# Altium PCB BeagleBone_Black_RevB4_V2.PcbDoc (part 1 of 3)
Units mm, origin at the board's own origin, x right, y up, seen from the top; angles counter-clockwise.
Board outline 100 x 100 mm, 2 copper layers (Top Layer, Bottom Layer); 274 components, 245 nets, 1313 pads, 251 vias.
Unrouted connection lines stored in the file: 891.
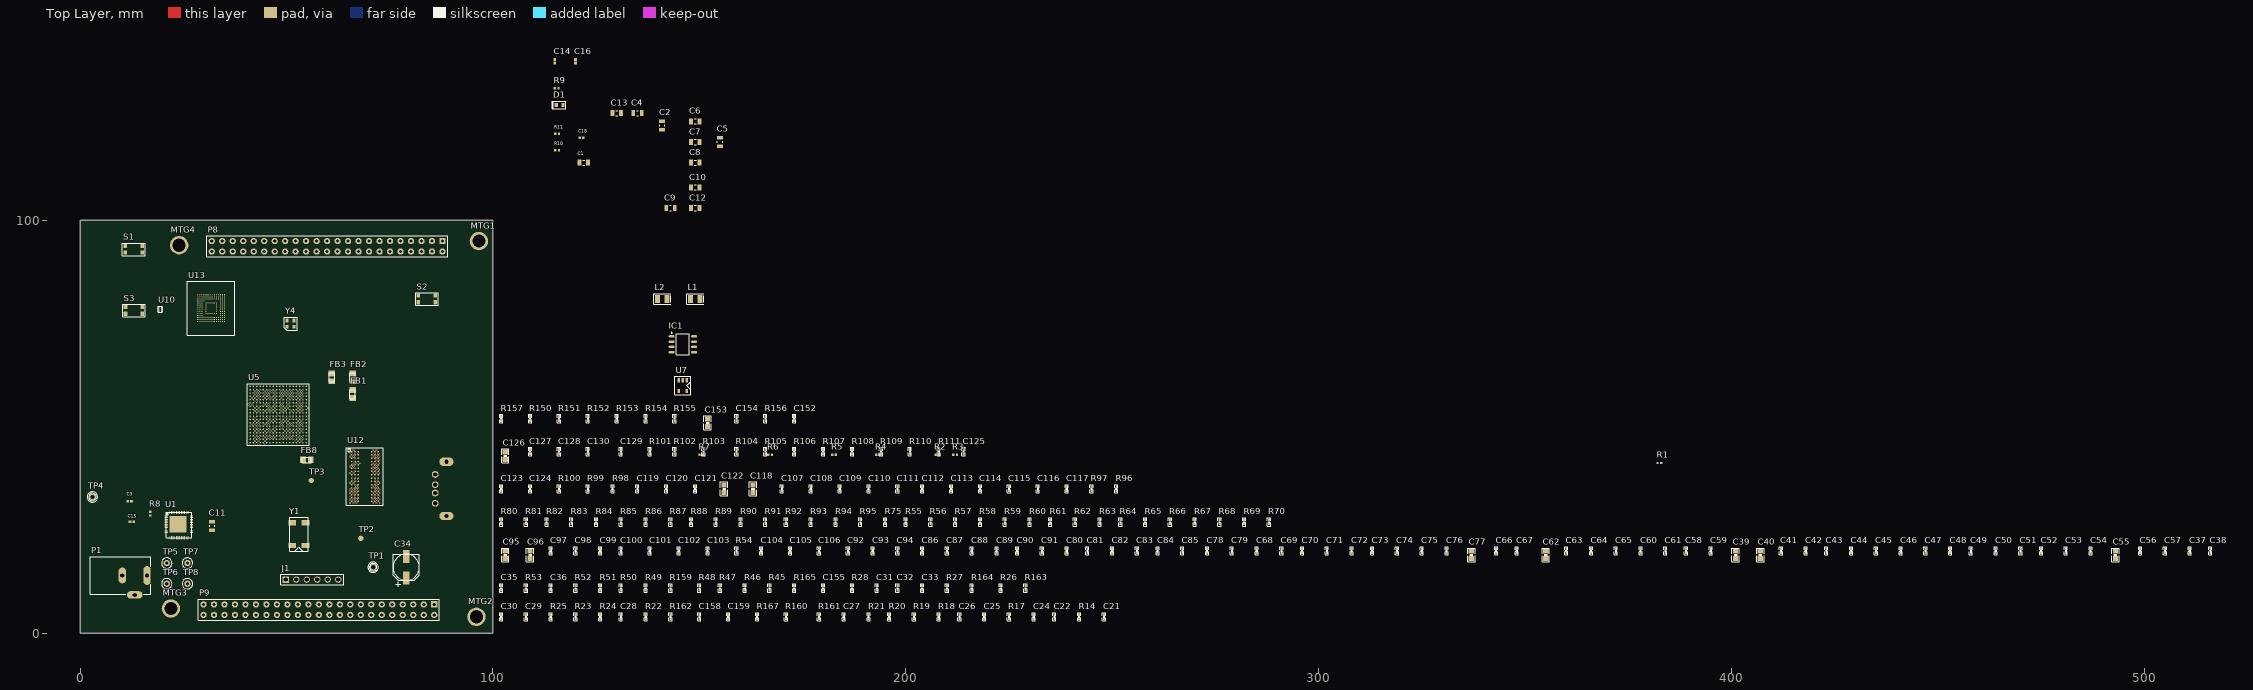
[diagram p0: Top Layer view]
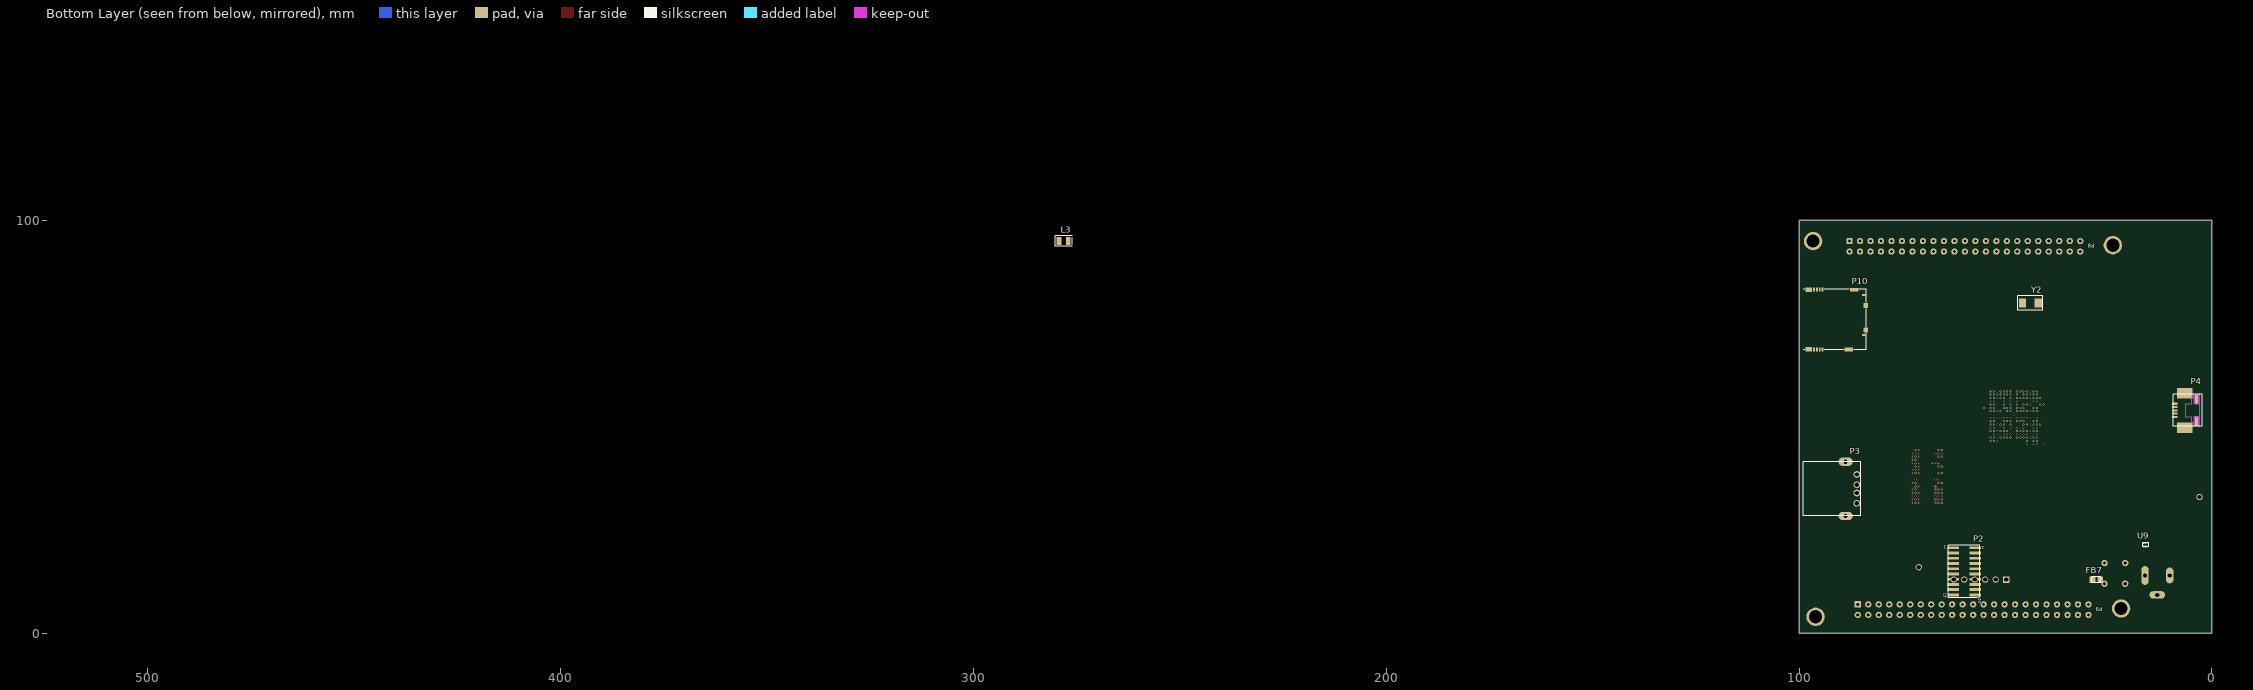
[diagram p1: Bottom Layer view, seen from below]

## Layer stack, top to bottom
Top Solder: solder mask 0.0102, Solder Resist, Dk 3.5
Top Layer: signal copper 0.0356
Dielectric 1: dielectric 0.32, FR-4, Dk 4.8
Bottom Layer: signal copper 0.0356
Bottom Solder: solder mask 0.0102, Solder Resist, Dk 3.5

## Board outline
0,0 100,0 100,100 0,100

## Design rules (kind name [scope] priority, off if disabled: settings)
Clearance Clearance_BGA_Fanout [WithinRoom('BGA_Fanout')] p1: gap=0.1 ignorepadtopadclearanceinfootprint=FALSE
Clearance [All] p2: gap=0.254 ignorepadtopadclearanceinfootprint=FALSE except(0: Arc-Hole Track-Hole SMDPad-Hole THPad-Hole Via-Hole Fill-Hole Poly-Hole Region-Hole Text-Hole)
FanoutControl Fanout_BGA [IsBGA] p1: bgadir=Out bgaviamode=Centered fanoutstyle=BGA fanoutdirection=Alternating viagrid=0.025 // Fanout_BGA (Default Rule)
PolygonConnect [All] p1: connectstyle=Relief reliefconductorwidth=0.254 reliefentries=4 polygonreliefangle="90 Angle" airgapwidth=0.254
RoutingVias RoutingVias_BGA_Fanout [WithinRoom('BGA_Fanout')] p1: holewidth=0.2 width=0.4 viastyle="Through Hole" minholewidth=0.2 minwidth=0.4 maxholewidth=0.2 maxwidth=0.4
RoutingVias [All] p2: holewidth=0.711 width=1.27 viastyle="Through Hole" minholewidth=0.711 minwidth=1.27 maxholewidth=0.711 maxwidth=1.27
SolderMaskExpansion [All] p1: expansion=0.102
Width Width_BGA_Fanout [WithinRoom('BGA_Fanout')] p1: maxlimit=0.1 minlimit=0.1 preferedwidth=0.1 minimp=50.000000 maximp=50.000000 favimp=50.000000
Width [All] p2: maxlimit=0.254 minlimit=0.254 preferedwidth=0.254
29 further rules are at their usual default settings.

## Classes and differential pairs
net class DDR_D[15..0]: DDR_D0 DDR_D1 DDR_D2 DDR_D3 DDR_D4 DDR_D5 DDR_D6 DDR_D7 DDR_D8 DDR_D9 DDR_D10 DDR_D11 DDR_D12 DDR_D13 DDR_D14 DDR_D15
net class DDR_BA[2..0]: DDR_BA0 DDR_BA1 DDR_BA2
net class DDR_A[15..0]: DDR_A0 DDR_A1 DDR_A2 DDR_A3 DDR_A4 DDR_A5 DDR_A6 DDR_A7 DDR_A8 DDR_A9 DDR_A10 DDR_A11 DDR_A12 DDR_A13 DDR_A14 DDR_A15
component class "P11_Exp Conn, uSD, and ": C152 C153 C154 P8 P9 P10 R150 R151 R152 R153 R154 R155 R156 R157 TP4 U7
component class P08_eMMC: C125 C126 C127 C128 C129 C130 R101 R102 R103 R104 R105 R106 R107 R108 R109 R110 R111 U13
component class "P07_DDR3 Memory": C107 C108 C109 C110 C111 C112 C113 C114 C115 C116 C117 C118 C119 C120 C121 C122 C123 C124 R96 R97 R98 R99 R100 U12
component class "P06_LED, Config, & Button": R55 R56 R57 R58 R59 R60 R61 R62 R63 R64 R65 R66 R67 R68 R69 R70 R75 R80 R81 R82 R83 R84 R85 R86 R87 R88 R89 R90 R91 R92 R93 R94 R95 S2
component class "P05_Processor Page 3 of 3": C37 C38 C39 C40 C41 C42 C43 C44 C45 C46 C47 C48 C49 C50 C51 C52 C53 C54 C55 C56 C57 C58 C59 C60 C61 C62 C63 C64 C65 C66 C67 C68 C69 C70 C71 C72 C73 C74 C75 C76 C77 C78 C79 C80 C81 C82 C83 C84 C85 C86 C87 C88 C89 C90 C91 C92 C93 C94 C95 C96 C97 C98 C99 C100 C101 C102 C103 C104 C105 C106 FB1 FB2 FB3 R54 TP2 TP3
component class "P04_Processor 2 or 3, USB and Serial": C31 C32 C33 C34 C35 C36 C155 FB7 FB8 J1 P3 P4 R26 R27 R28 R45 R46 R47 R48 R49 R50 R51 R52 R53 R159 R163 R164 R165 U8 U9 U10 U15
component class "P03_Processor 1 of 3, JTAG Header": C21 C22 C24 C25 C26 C27 C28 C29 C30 C158 C159 P2 "P02_Power Management" R14 R17 R18 R19 R20 R21 R22 R23 R24 R25 R160 R161 R162 R167 S1 U3 U5 Y1 Y2 Y4
component class "P02_Power Management": C1 C2 C3 C4 C5 C6 C7 C8 C9 C10 C11 C12 C13 C14 C15 C16 C18 D1 IC1 L1 L2 L3 MTG1 MTG2 MTG3 MTG4 P1 R1 R2 R3 R4 R5 R6 R7 R8 R9 R10 R11 S3 TP1 TP5 TP6 TP7 TP8 U1

## Components (designator, comment, footprint, x,y, rotation, side; value= is the part's Value field where it differs from the comment)
C1 "C2012X6S1A106K085AC" CAP0805 122,114 r0 top
C2 "C2012X6S1A106K085AC" CAP0805 141,123 r90 top
C3 "C0402C104K4RACTU" CAP0402 12,32 r0 top
C4 "C2012X6S1A106K085AC" CAP0805 135.025,126 r0 top
C5 "C2012X6S1A106K085AC" CAP0805 155,119 r90 top
C6 "C2012X6S1A106K085AC" CAP0805 149,124 r180 top
C7 "C2012X6S1A106K085AC" CAP0805 149,119 r0 top
C8 "C2012X6S1A106K085AC" CAP0805 149.025,114 r0 top
C9 "C2012X6S1A106K085AC" CAP0805 143,103 r0 top
C10 "C2012X6S1A106K085AC" CAP0805 149.025,108 r0 top
C11 "C2012X6S1A106K085AC" CAP0805 32,26 r90 top
C12 "C2012X6S1A106K085AC" CAP0805 149,103 r0 top
C13 "C2012X6S1A106K085AC" CAP0805 130,126 r0 top
C14 "C1005X5R0J225K050BC" CAP0402 115,138.56 r90 top
C15 "C1005X5R0J225K050BC" CAP0402 12.56,27 r180 top
C16 "C1005X5R0J225K050BC" CAP0402 120,138.56 r90 top
C18 "C0402C104K4RACTU" CAP0402 121.44,120 r180 top
C21 "18pF, 50V" 402 248,4 r90 top
C22 "18pF, 50V" 402 236,4 r90 top
C24 "1uF, 10V" 402 231,4 r90 top
C25 "18pF, 50V" 402 219,4 r90 top
C26 "18pF, 50V" 402 213,4 r90 top
C27 "0.1uf, 6V3" 402 185,4 r90 top
C28 "0.1uf, 6V3" 402 131,4 r90 top
C29 "0.1uf, 6V3" 402 108,4 r90 top
C30 "0.1uf, 6V3" 402 102,4 r90 top
C31 "0.1uf, 6V3" 402 193,11 r90 top
C32 "1nF, 50V" 402 198,11 r90 top
C33 "0.1uf, 6V3" 402 204,11 r90 top
C34 "100uF, 6V3" RD205SMD_250D 79,16 r90 top
C35 "0.1uf, 6V3" 402 102,11 r90 top
C36 "0.1uf, 6V3" 402 114,11 r90 top
C37 "0.1uf, 6V3" 402 511,20 r90 top
C38 "0.1uf, 6V3" 402 516,20 r90 top
C39 "10uF, 10V" 805 401,19 r90 top
C40 "10uF, 10V" 805 407,19 r90 top
C41 "0.1uf, 6V3" 402 412,20 r90 top
C42 "0.1uf, 6V3" 402 418,20 r90 top
C43 "0.1uf, 6V3" 402 423,20 r90 top
C44 "0.1uf, 6V3" 402 429,20 r90 top
C45 "0.1uf, 6V3" 402 435,20 r90 top
C46 "0.1uf, 6V3" 402 441,20 r90 top
C47 "0.1uf, 6V3" 402 447,20 r90 top
C48 "0.1uf, 6V3" 402 453,20 r90 top
C49 "0.1uf, 6V3" 402 458,20 r90 top
C50 "0.1uf, 6V3" 402 464,20 r90 top
C51 "0.1uf, 6V3" 402 470,20 r90 top
C52 "0.1uf, 6V3" 402 475,20 r90 top
C53 "0.1uf, 6V3" 402 481,20 r90 top
C54 "0.1uf, 6V3" 402 487,20 r90 top
C55 "10uF, 10V" 805 493,19 r90 top
C56 "0.1uf, 6V3" 402 499,20 r90 top
C57 "0.1uf, 6V3" 402 505,20 r90 top
C58 "0.1uf, 6V3" 402 389,20 r90 top
C59 "0.1uf, 6V3" 402 395,20 r90 top
C60 "0.1uf, 6V3" 402 378,20 r90 top
C61 "0.1uf, 6V3" 402 384,20 r90 top
C62 "10uF, 10V" 805 355,19 r90 top
C63 "0.1uf, 6V3" 402 360,20 r90 top
C64 "0.1uf, 6V3" 402 366,20 r90 top
C65 "0.1uf, 6V3" 402 372,20 r90 top
C66 "0.1uf, 6V3" 402 343,20 r90 top
C67 "0.1uf, 6V3" 402 348,20 r90 top
C68 "0.1uf, 6V3" 402 285,20 r90 top
C69 "0.1uf, 6V3" 402 291,20 r90 top
C70 "0.1uf, 6V3" 402 296,20 r90 top
C71 "0.1uf, 6V3" 402 302,20 r90 top
C72 "0.1uf, 6V3" 402 308,20 r90 top
C73 "0.1uf, 6V3" 402 313,20 r90 top
C74 "0.1uf, 6V3" 402 319,20 r90 top
C75 "0.1uf, 6V3" 402 325,20 r90 top
C76 "0.1uf, 6V3" 402 331,20 r90 top
C77 "10uF, 10V" 805 337,19 r90 top
C78 "0.1uf, 6V3" 402 273,20 r90 top
C79 "0.1uf, 6V3" 402 279,20 r90 top
C80 "0.1uf, 6V3" 402 239,20 r90 top
C81 "0.1uf, 6V3" 402 244,20 r90 top
C82 "0.1uf, 6V3" 402 250,20 r90 top
C83 "0.1uf, 6V3" 402 256,20 r90 top
C84 "0.1uf, 6V3" 402 261,20 r90 top
C85 "0.1uf, 6V3" 402 267,20 r90 top
C86 "0.1uf, 6V3" 402 204,20 r90 top
C87 "0.1uf, 6V3" 402 210,20 r90 top
C88 "0.1uf, 6V3" 402 216,20 r90 top
C89 "1uF, 10V" 402 222,20 r90 top
C90 "1uF, 10V" 402 227,20 r90 top
C91 "1uF, 10V" 402 233,20 r90 top
C92 "0.1uf, 6V3" 402 186,20 r90 top
C93 "0.1uf, 6V3" 402 192,20 r90 top
C94 "0.1uf, 6V3" 402 198,20 r90 top
C95 "10uF, 10V" 805 103,19 r90 top
C96 "10uF, 10V" 805 109,19 r90 top
C97 "0.1uf, 6V3" 402 114,20 r90 top
C98 "0.1uf, 6V3" 402 120,20 r90 top
C99 "0.1uf, 6V3" 402 126,20 r90 top
C100 "0.1uf, 6V3" 402 131,20 r90 top
C101 "0.1uf, 6V3" 402 138,20 r90 top
C102 "0.1uf, 6V3" 402 145,20 r90 top
C103 "0.1uf, 6V3" 402 152,20 r90 top
C104 "1uF, 10V" 402 165,20 r90 top
C105 "0.1uf, 6V3" 402 172,20 r90 top
C106 "0.1uf, 6V3" 402 179,20 r90 top
C107 "0.1uf, 6V3" 402 170,35 r90 top
C108 "0.1uf, 6V3" 402 177,35 r90 top
C109 "0.1uf, 6V3" 402 184,35 r90 top
C110 "0.1uf, 6V3" 402 191,35 r90 top
C111 "0.1uf, 6V3" 402 198,35 r90 top
C112 "0.1uf, 6V3" 402 204,35 r90 top
C113 "0.1uf, 6V3" 402 211,35 r90 top
C114 "0.1uf, 6V3" 402 218,35 r90 top
C115 "0.1uf, 6V3" 402 225,35 r90 top
C116 "0.1uf, 6V3" 402 232,35 r90 top
C117 "0.1uf, 6V3" 402 239,35 r90 top
C118 "10uF, 10V" 805 163,35 r90 top
C119 "0.1uf, 6V3" 402 135,35 r90 top
C120 "0.1uf, 6V3" 402 142,35 r90 top
C121 "0.1uf, 6V3" 402 149,35 r90 top
C122 "10uF, 10V" 805 156,35 r90 top
C123 "1nF, 50V" 402 102,35 r90 top
C124 "0.1uf, 6V3" 402 109,35 r90 top
C125 "2.2uF, 6V3" 402 214,44 r90 top
C126 "10uF, 10V" 805 103,43 r90 top
C127 "0.1uf, 6V3" 402 109,44 r90 top
C128 "0.1uf, 6V3" 402 116,44 r90 top
C129 "0.1uf, 6V3" 402 131,44 r90 top
C130 "0.1uf, 6V3" 402 123,44 r90 top
C152 "0.1uf, 6V3" 402 173,52 r90 top
C153 "10uF, 10V" 805 152,51 r90 top
C154 "0.1uf, 6V3" 402 159,52 r90 top
C155 "0.1uf, 6V3" 402 180,11 r90 top
C158 "0.1uf, 6V3" 402 150,4 r90 top
C159 "0.1uf, 6V3" 402 157,4 r90 top
D1 "598-8170-107F" LED_0603 116.174,128 r0 top
FB1 "150OHM800mA" SM-7351-IND-0805 66,57.95 r90 top
FB2 "150OHM800mA" SM-7351-IND-0805 66,62 r90 top
FB3 "150OHM800mA" SM-7351-IND-0805 61,62 r90 top
FB7 "150OHM800mA" SM-7351-IND-0805 28,13 r180 bottom
FB8 "0.1 Ohm, 0805" SM-7351-IND-0805 54.95,42 r180 top
IC1 "TL5209" SOIC-8 146,70 r0 top
J1 "HEADER 6" SIP6 56.19,13 r90 top
L1 "2.2uH, 2.6A" 2520 149,81 r0 top
L2 "2.2uH, 2.6A" 2520 141,81 r0 top
L3 "2.2uH, 2.6A" 2520 278.143,95 r180 bottom
MTG1 "MHOLE" MTGH200C125D_PL 97,95 r0 top
MTG2 "MHOLE" MTGH200C125D_PL 96.394,4 r0 top
MTG3 "MHOLE" MTGH200C125D_PL 22.394,6 r0 top
MTG4 "MHOLE" MTGH200C125D_PL 24.394,94 r0 top
P1 "PJ-200A" CONN3-PWR-PJ102A 10,14 r180 top
P2 "CTI JTAG,DNI" HEADER10X2_SMD 60,15 r90 bottom
P3 "USB-A Conn. - 87520-xx1xx" usb_a_sh 92,35 r270 bottom
P4 "mini USB-B" USB5MINI_4SHIELDED_SMD-5 6,54 r180 bottom
P8 "FEMALE HEADER 2x23" HEADER23X2 59.84,93.73 r180 top
P9 "FEMALE HEADER 2x23" HEADER23X2 57.84,5.73 r180 top
P10 "MOLEX 502570-001" SD-MICRO-SCHA5B0300 91,76 r90 bottom
R1 "RC0402FR-07100KL" RES0402 382.524,41.275 r0 top
R2 "RC0402FR-071K5L" RES0402 207.631,43.275 r0 top
R3 "RC0402FR-071K5L" RES0402 211.949,43.275 r0 top
R4 "RC0402JR-070RL" RES0402 193.28,43.275 r0 top
R5 "RC0402JR-070RL" RES0402 182.62,43.275 r0 top
R6 "RC0402JR-070RL" RES0402 167.126,43.275 r0 top
R7 "RC0402JR-070RL" RES0402 150.489,43.275 r0 top
R8 "RC0402JR-070RL" RES0402 17,29 r90 top
R9 "RC0402FR-07820RL" RES0402 115.45,132 r0 top
R10 "RC0402FR-07470KL" RES0402 115.55,117 r180 top
R11 "RC0402FR-07280KL" RES0402 115.55,121 r0 top
R14 "10K, 1%" 402 242,4 r90 top
R17 "1M, 1%" 402 225,4 r90 top
R18 "33, 0402" 402 208,4 r90 top
R19 "0R, 1%" 402 202,4 r90 top
R20 "0R, 1%" 402 196,4 r90 top
R21 "33, 0402" 402 191,4 r90 top
R22 "49.9, 1%" 402 137,4 r90 top
R23 "4.75K, 1%" 402 120,4 r90 top
R24 "4.75K, 1%" 402 126,4 r90 top
R25 "4.75K, 1%" 402 114,4 r90 top
R26 "4.75K, 1%" 402 223,11 r90 top
R27 "0R, 1%" 402 210,11 r90 top
R28 "33, 0402" 402 187,11 r90 top
R45 "33, 0402" 402 167,11 r90 top
R46 "33, 0402" 402 161,11 r90 top
R47 "33, 0402" 402 155,11 r90 top
R48 "33, 0402" 402 150,11 r90 top
R49 "0R, 1%" 402 137,11 r90 top
R50 "0R, 1%" 402 131,11 r90 top
R51 "0R, 1%" 402 126,11 r90 top
R52 "10k, 1%" 402 120,11 r90 top
R53 "10k, 1%" 402 108,11 r90 top
R54 "10k, 1%" 402 159,20 r90 top
R55 "100K, 1%, DNI" 402 200,27 r90 top
R56 "100K, 1%" 402 206,27 r90 top
R57 "100K, 1%, DNI" 402 212,27 r90 top
R58 "100K, 1%,DNI" 402 218,27 r90 top
R59 "100K, 1%, DNI" 402 224,27 r90 top
R60 "100K, 1%,DNI" 402 230,27 r90 top
R61 "100K, 1%,DNI" 402 235,27 r90 top
R62 "100K, 1%,DNI" 402 241,27 r90 top
R63 "100K, 1%,DNI" 402 247,27 r90 top
R64 "100K, 1%,DNI" 402 252,27 r90 top
R65 "100K, 1%" 402 258,27 r90 top
R66 "100K, 1%" 402 264,27 r90 top
R67 "100K, 1%" 402 270,27 r90 top
R68 "100K, 1%" 402 276,27 r90 top
R69 "100K, 1%, DNI" 402 282,27 r90 top
R70 "100K, 1%,DNI" 402 288,27 r90 top
R75 "100" 402 195,27 r90 top
R80 "100K, 1%" 402 102,27 r90 top
R81 "100K, 1%, DNI" 402 108,27 r90 top
R82 "100K, 1%" 402 113,27 r90 top
R83 "100K, 1%" 402 119,27 r90 top
R84 "100K, 1%" 402 125,27 r90 top
R85 "100K, 1%" 402 131,27 r90 top
R86 "100K, 1%" 402 137,27 r90 top
R87 "100K, 1%" 402 143,27 r90 top
R88 "100K, 1%" 402 148,27 r90 top
R89 "100K, 1%" 402 154,27 r90 top
R90 "100K, 1%, DNI" 402 160,27 r90 top
R91 "100K, 1%, DNI" 402 166,27 r90 top
R92 "100K, 1%, DNI" 402 171,27 r90 top
R93 "100K, 1%, DNI" 402 177,27 r90 top
R94 "100K, 1%" 402 183,27 r90 top
R95 "100K, 1%" 402 189,27 r90 top
R96 "10k, 1%" 402 251,35 r90 top
R97 "1.5K, 1%" 402 245,35 r90 top
R98 "10k, 1%" 402 129,35 r90 top
R99 "240, 1%" 402 123,35 r90 top
R100 "10k, 1%" 402 116,35 r90 top
R101 "10k, 1%" 402 138,44 r90 top
R102 "10k, 1%" 402 144,44 r90 top
R103 "10k, 1%" 402 151,44 r90 top
R104 "10k, 1%" 402 159,44 r90 top
R105 "10k, 1%" 402 166,44 r90 top
R106 "10k, 1%" 402 173,44 r90 top
R107 "10k, 1%" 402 180,44 r90 top
R108 "10k, 1%" 402 187,44 r90 top
R109 "10k, 1%" 402 194,44 r90 top
R110 "10k, 1%" 402 201,44 r90 top
R111 "10k, 1%" 402 208,44 r90 top
R150 "10k, 1%" 402 109,52 r90 top
R151 "10k, 1%" 402 116,52 r90 top
R152 "10k, 1%" 402 123,52 r90 top
R153 "10k, 1%" 402 130,52 r90 top
R154 "10k, 1%" 402 137,52 r90 top
R155 "10k, 1%" 402 144,52 r90 top
R156 "10k, 1%" 402 166,52 r90 top
R157 "10k, 1%" 402 102,52 r90 top
R159 "0R, 1%" 402 143,11 r90 top
R160 "0R, 1%" 402 171,4 r90 top
R161 "0R, 1%" 402 179,4 r90 top
R162 "0R, 1%" 402 143,4 r90 top
R163 "4.75K, 1%" 402 229,11 r90 top
R164 "4.75K, 1%" 402 216,11 r90 top
R165 "100K, 1%" 402 173,11 r90 top
R167 "33, 0402" 402 164,4 r90 top
S1 "KMR231GLFS" SW4SMD_63X161LS 13,93 r0 top
S2 "KMR231GLFS" SW4SMD_63X161LS 84,81 r0 top
S3 "KMR231GLFS" SW4SMD_63X161LS 13.05,78.2 r0 top
TP1 "TESTPT1" tp1-8040 71,16 r0 top
TP2 "TESTPT1" TP60C_SMD 68,23 r90 top
TP3 "TESTPT1" TP60C_SMD 56,37 r90 top
TP4 "TESTPT1" tp1-8040 3,33 r0 top
TP5 "TESTPT1" TP60C33D 21,17 r0 top
TP6 "TESTPT1" TP60C33D 21,12 r0 top
TP7 "TESTPT1" TP60C33D 26,17 r0 top
TP8 "TESTPT1" TP60C33D 26,12 r0 top
U1 "TPS65217C" U_48_RSL 23.925,26.2 r0 top
U5 "IC_AM335X_ZCE_1" am33xx_15x15 48,53 r0 top
U7 "24LC32A" SOT23-5 146,60 r0 top
U9 "TPD4S012" U_6_DRY 16,21.439 r180 bottom
U10 "TPD4S012" U_6_DRY 19.439,78.5 r90 top
U12 "MT41K256M16HA -125:E" BGA96_T9_P8_9X14 69,38 r0 top
U13 "eMMC, 2GB" BGA153_P14_P5_11P5X13 31.75,78.75 r0 top
Y1 "32.768kHz" XTAL4_126-216SMD 53,24 r90 top
Y2 "24MHz" XTAL150SMD_125X196 44,80 r180 bottom
Y4 "24.576MHz" OSC4_61X65LS_79X98SMD 51,75 r0 top

## Footprints (in the part's own frame and the unit in brackets; to place one, negate y for a bottom-side part, rotate by r counter-clockwise, add the part's x,y. Pads: shape width x height; smd on the part's side, far side on the other; paste and mask are expansions set on the pad)
402 [mil] "402"
  rect 25x20 smd mask+2: 1(-20,0) 2(20,0)
  silkscreen extent -40,-15 40,15
805 [mil] "805"
  rect 45x50 smd mask+2: 1(-35,0) 2(35,0)
  silkscreen extent -65,-35 65,35
2520 [mil] "2520"
  rect 45x75 smd mask+2: 1(45,0) 2(-45,0)
  silkscreen extent -80,-50 80,50
am33xx_15x15 [mil] "AM33XX_15X15"
  round 14 smd mask+0: A1(-267.72,267.72) A2(-236.22,267.72) A3(-204.72,267.72) A4(-173.23,267.72) A5(-141.73,267.72) A6(-110.24,267.72) A7(-78.74,267.72) A8(-47.24,267.72) A9(-15.75,267.72) A10(15.75,267.72) A11(47.24,267.72) A12(78.74,267.72) A13(110.24,267.72) A14(141.73,267.72) A15(173.23,267.72) A16(204.72,267.72) A17(236.22,267.72) A18(267.72,267.72) B1(-267.72,236.22) B2(-236.22,236.22) B3(-204.72,236.22) B4(-173.23,236.22) B5(-141.73,236.22) B6(-110.24,236.22) B7(-78.74,236.22) B8(-47.24,236.22) B9(-15.75,236.22) B10(15.75,236.22) B11(47.24,236.22) B12(78.74,236.22) B13(110.24,236.22) B14(141.73,236.22) B15(173.23,236.22) B16(204.72,236.22) B17(236.22,236.22) B18(267.72,236.22) C1(-267.72,204.72) C2(-236.22,204.72) C3(-204.72,204.72) C4(-173.23,204.72) C5(-141.73,204.72) C6(-110.24,204.72) C7(-78.74,204.72) C8(-47.24,204.72) C9(-15.75,204.72) C10(15.75,204.72) C11(47.24,204.72) C12(78.74,204.72) C13(110.24,204.72) C14(141.73,204.72) C15(173.23,204.72) C16(204.72,204.72) C17(236.22,204.72) C18(267.72,204.72) D1(-267.72,173.23) D2(-236.22,173.23) D3(-204.72,173.23) D4(-173.23,173.23) D5(-141.73,173.23) D6(-110.24,173.23) D7(-78.74,173.23) D8(-47.24,173.23) D9(-15.75,173.23) D10(15.75,173.23) D11(47.24,173.23) D12(78.74,173.23) D13(110.24,173.23) D14(141.73,173.23) D15(173.23,173.23) D16(204.72,173.23) D17(236.22,173.23) D18(267.72,173.23) E1(-267.72,141.73) E2(-236.22,141.73) E3(-204.72,141.73) E4(-173.23,141.73) E5(-141.73,141.73) E6(-110.24,141.73) E7(-78.74,141.73) E8(-47.24,141.73) E9(-15.75,141.73) E10(15.75,141.73) E11(47.24,141.73) E12(78.74,141.73) E13(110.24,141.73) E14(141.73,141.73) E15(173.23,141.73) E16(204.72,141.73) E17(236.22,141.73) E18(267.72,141.73) F1(-267.72,110.24) F2(-236.22,110.24) F3(-204.72,110.24) F4(-173.23,110.24) F5(-141.73,110.24) F6(-110.24,110.24) F7(-78.74,110.24) F8(-47.24,110.24) F9(-15.75,110.24) F10(15.75,110.24) F11(47.24,110.24) F12(78.74,110.24) F13(110.24,110.24) F14(141.73,110.24) F15(173.23,110.24) F16(204.72,110.24) F17(236.22,110.24) F18(267.72,110.24) G1(-267.72,78.74) G2(-236.22,78.74) G3(-204.72,78.74) G4(-173.23,78.74) G5(-141.73,78.74) G6(-110.24,78.74) G7(-78.74,78.74) G8(-47.24,78.74) G9(-15.75,78.74) G10(15.75,78.74) G11(47.24,78.74) G12(78.74,78.74) G13(110.24,78.74) G14(141.73,78.74) G15(173.23,78.74) G16(204.72,78.74) G17(236.22,78.74) G18(267.72,78.74) H1(-267.72,47.24) H2(-236.22,47.24) H3(-204.72,47.24) H4(-173.23,47.24) H5(-141.73,47.24) H6(-110.24,47.24) H7(-78.74,47.24) H8(-47.24,47.24) H9(-15.75,47.24) H10(15.75,47.24) H11(47.24,47.24) H12(78.74,47.24) H13(110.24,47.24) H14(141.73,47.24) H15(173.23,47.24) H16(204.72,47.24) H17(236.22,47.24) H18(267.72,47.24) J1(-267.72,15.75) J2(-236.22,15.75) J3(-204.72,15.75) J4(-173.23,15.75) J5(-141.73,15.75) J6(-110.24,15.75) J7(-78.74,15.75) J8(-47.24,15.75) J9(-15.75,15.75) J10(15.75,15.75) J11(47.24,15.75) J12(78.74,15.75) J13(110.24,15.75) J14(141.73,15.75) J15(173.23,15.75) J16(204.72,15.75) J17(236.22,15.75) J18(267.72,15.75) K1(-267.72,-15.75) K2(-236.22,-15.75) K3(-204.72,-15.75) K4(-173.23,-15.75) K5(-141.73,-15.75) K6(-110.24,-15.75) K7(-78.74,-15.75) K8(-47.24,-15.75) K9(-15.75,-15.75) K10(15.75,-15.75) K11(47.24,-15.75) K12(78.74,-15.75) K13(110.24,-15.75) K14(141.73,-15.75) K15(173.23,-15.75) K16(204.72,-15.75) K17(236.22,-15.75) K18(267.72,-15.75) L1(-267.72,-47.24) L2(-236.22,-47.24) L3(-204.72,-47.24) L4(-173.23,-47.24) L5(-141.73,-47.24) L6(-110.24,-47.24) L7(-78.74,-47.24) L8(-47.24,-47.24) L9(-15.75,-47.24) L10(15.75,-47.24) L11(47.24,-47.24) L12(78.74,-47.24) L13(110.24,-47.24) L14(141.73,-47.24) L15(173.23,-47.24) L16(204.72,-47.24) L17(236.22,-47.24) L18(267.72,-47.24) M1(-267.72,-78.74) M2(-236.22,-78.74) M3(-204.72,-78.74) M4(-173.23,-78.74) M5(-141.73,-78.74) M6(-110.24,-78.74) M7(-78.74,-78.74) M8(-47.24,-78.74) M9(-15.75,-78.74) M10(15.75,-78.74) M11(47.24,-78.74) M12(78.74,-78.74) M13(110.24,-78.74) M14(141.73,-78.74) M15(173.23,-78.74) M16(204.72,-78.74) M17(236.22,-78.74) M18(267.72,-78.74) N1(-267.72,-110.24) N2(-236.22,-110.24) N3(-204.72,-110.24) N4(-173.23,-110.24) N5(-141.73,-110.24) N6(-110.24,-110.24) N7(-78.74,-110.24) N8(-47.24,-110.24) N9(-15.75,-110.24) N10(15.75,-110.24) N11(47.24,-110.24) N12(78.74,-110.24) N13(110.24,-110.24) N14(141.73,-110.24) N15(173.23,-110.24) N16(204.72,-110.24) N17(236.22,-110.24) N18(267.72,-110.24) P1(-267.72,-141.73) P2(-236.22,-141.73) P3(-204.72,-141.73) P4(-173.23,-141.73) P5(-141.73,-141.73) P6(-110.24,-141.73) P7(-78.74,-141.73) P8(-47.24,-141.73) P9(-15.75,-141.73) P10(15.75,-141.73) P11(47.24,-141.73) P12(78.74,-141.73) P13(110.24,-141.73) P14(141.73,-141.73) P15(173.23,-141.73) P16(204.72,-141.73) P17(236.22,-141.73) P18(267.72,-141.73) R1(-267.72,-173.23) R2(-236.22,-173.23) R3(-204.72,-173.23) R4(-173.23,-173.23) R5(-141.73,-173.23) R6(-110.24,-173.23) R7(-78.74,-173.23) R8(-47.24,-173.23) R9(-15.75,-173.23) R10(15.75,-173.23) R11(47.24,-173.23) R12(78.74,-173.23) R13(110.24,-173.23) R14(141.73,-173.23) R15(173.23,-173.23) R16(204.72,-173.23) R17(236.22,-173.23) R18(267.72,-173.23) T1(-267.72,-204.72) T2(-236.22,-204.72) T3(-204.72,-204.72) T4(-173.23,-204.72) T5(-141.73,-204.72) T6(-110.24,-204.72) T7(-78.74,-204.72) T8(-47.24,-204.72) T9(-15.75,-204.72) T10(15.75,-204.72) T11(47.24,-204.72) T12(78.74,-204.72) T13(110.24,-204.72) T14(141.73,-204.72) T15(173.23,-204.72) T16(204.72,-204.72) T17(236.22,-204.72) T18(267.72,-204.72) U1(-267.72,-236.22) U2(-236.22,-236.22) U3(-204.72,-236.22) U4(-173.23,-236.22) U5(-141.73,-236.22) U6(-110.24,-236.22) U7(-78.74,-236.22) U8(-47.24,-236.22) U9(-15.75,-236.22) U10(15.75,-236.22) U11(47.24,-236.22) U12(78.74,-236.22) U13(110.24,-236.22) U14(141.73,-236.22) U15(173.23,-236.22) U16(204.72,-236.22) U17(236.22,-236.22) U18(267.72,-236.22) V1(-267.72,-267.72) V2(-236.22,-267.72) V3(-204.72,-267.72) V4(-173.23,-267.72) V5(-141.73,-267.72) V6(-110.24,-267.72) V7(-78.74,-267.72) V8(-47.24,-267.72) V9(-15.75,-267.72) V10(15.75,-267.72) V11(47.24,-267.72) V12(78.74,-267.72) V13(110.24,-267.72) V14(141.73,-267.72) V15(173.23,-267.72) V16(204.72,-267.72) V17(236.22,-267.72) V18(267.72,-267.72)
  silkscreen extent -295,-295 295,295
BGA96_T9_P8_9X14 [mil] "BGA96_T9_P8_9X14"
  round 14 smd mask+2: A1(-126,236.25) A2(-94.5,236.25) A3(-63,236.25) A7(63,236.25) A8(94.5,236.25) A9(126,236.25) B1(-126,204.75) B2(-94.5,204.75) B3(-63,204.75) B7(63,204.75) B8(94.5,204.75) B9(126,204.75) C1(-126,173.25) C2(-94.5,173.25) C3(-63,173.25) C7(63,173.25) C8(94.5,173.25) C9(126,173.25) D1(-126,141.75) D2(-94.5,141.75) D3(-63,141.75) D7(63,141.75) D8(94.5,141.75) D9(126,141.75) E1(-126,110.25) E2(-94.5,110.25) E3(-63,110.25) E7(63,110.25) E8(94.5,110.25) E9(126,110.25) F1(-126,78.75) F2(-94.5,78.75) F3(-63,78.75) F7(63,78.75) F8(94.5,78.75) F9(126,78.75) G1(-126,47.25) G2(-94.5,47.25) G3(-63,47.25) G7(63,47.25) G8(94.5,47.25) G9(126,47.25) H1(-126,15.75) H2(-94.5,15.75) H3(-63,15.75) H7(63,15.75) H8(94.5,15.75) H9(126,15.75) J1(-126,-15.75) J2(-94.5,-15.75) J3(-63,-15.75) J7(63,-15.75) J8(94.5,-15.75) J9(126,-15.75) K1(-126,-47.25) K2(-94.5,-47.25) K3(-63,-47.25) K7(63,-47.25) K8(94.5,-47.25) K9(126,-47.25) L1(-126,-78.75) L2(-94.5,-78.75) L3(-63,-78.75) L7(63,-78.75) L8(94.5,-78.75) L9(126,-78.75) M1(-126,-110.25) M2(-94.5,-110.25) M3(-63,-110.25) M7(63,-110.25) M8(94.5,-110.25) M9(126,-110.25) N1(-126,-141.75) N2(-94.5,-141.75) N3(-63,-141.75) N7(63,-141.75) N8(94.5,-141.75) N9(126,-141.75) P1(-126,-173.25) P2(-94.5,-173.25) P3(-63,-173.25) P7(63,-173.25) P8(94.5,-173.25) P9(126,-173.25) R1(-126,-204.75) R2(-94.5,-204.75) R3(-63,-204.75) R7(63,-204.75) R8(94.5,-204.75) R9(126,-204.75) T1(-126,-236.25) T2(-94.5,-236.25) T3(-63,-236.25) T7(63,-236.25) T8(94.5,-236.25) T9(126,-236.25)
  Top Layer lines w4.75: -141.75,-63 -126,-47.25 ; -141.75,31.5 -126,15.75 ; -110.25,-252 -94.5,-236.25 ; -110.25,-220.5 -94.5,-204.75 ; -110.25,-189 -94.5,-173.25 ; -110.25,-157.5 -94.5,-141.75 ; -110.25,-126 -94.5,-110.25 ; -110.25,189 -94.5,173.25 ; -110.25,252 -94.5,236.25 ; -78.75,-252 -63,-236.25 ; -78.75,-220.5 -63,-204.75 ; -78.75,-189 -63,-173.25 ; -78.75,-157.5 -63,-141.75 ; -78.75,-126 -63,-110.25 ; -78.75,-94.5 -63,-78.75 ; -78.75,-31.5 -63,-15.75 ; -63,110.25 -47.25,126 ; 63,-236.25 78.75,-252 ; 63,-204.75 78.75,-220.5 ; 63,-173.25 78.75,-189 ; 63,-141.75 78.75,-157.5 ; 63,-78.75 78.75,-94.5 ; 63,15.75 78.75,31.5 ; 63,78.75 78.75,94.5 ; 63,110.25 78.75,126 ; 63,173.25 78.75,189 ; 63,204.75 78.75,220.5 ; 63,236.25 78.75,252 ; 94.5,-236.25 110.25,-252 ; 94.5,-204.75 110.25,-220.5 ; 94.5,-173.25 110.25,-189 ; 94.5,-141.75 110.25,-157.5 ; 94.5,-110.25 110.25,-126 ; 94.5,-78.75 110.25,-94.5 ; 94.5,15.75 110.25,31.5 ; 94.5,78.75 110.25,94.5 ; 94.5,173.25 110.25,189 ; 94.5,204.75 110.25,220.5 ; 126,-47.25 141.75,-63
  Top Layer lines w10: -141.75,-252 -126,-236.25 ; -141.75,-220.5 -126,-204.75 ; -141.75,-189 -126,-173.25 ; -141.75,-157.5 -126,-141.75 ; -141.75,-126 -126,-110.25 ; -141.75,94.5 -126,78.75 ; -141.75,189 -126,173.25 ; -141.75,220.5 -126,204.75 ; -141.75,252 -126,236.25 ; -126,110.25 -110.25,94.5 ; -110.25,-63 -94.5,-47.25 ; -110.25,-31.5 -94.5,-15.75 ; -110.25,31.5 -94.5,15.75 ; -110.25,126 -94.5,110.25 ; -110.25,220.5 -94.5,204.75 ; -94.5,141.75 -78.75,126 ; -78.75,220.5 -63,204.75 ; 63,47.25 78.75,63 ; 94.5,-47.25 110.25,-63 ; 94.5,-15.75 110.25,-31.5 ; 94.5,47.25 110.25,63 ; 94.5,110.25 110.25,126 ; 94.5,141.75 110.25,157.5 ; 94.5,236.25 110.25,252 ; 126,-236.25 141.75,-252 ; 126,-204.75 141.75,-220.5 ; 126,-173.25 141.75,-189 ; 126,-141.75 141.75,-157.5 ; 126,-110.25 141.75,-126 ; 126,15.75 141.75,31.5 ; 126,47.25 141.75,63 ; 126,110.25 141.75,126 ; 126,141.75 141.75,157.5 ; 126,173.25 141.75,189 ; 126,204.75 141.75,220.5
  silkscreen extent -177,-276 177,276
BGA153_P14_P5_11P5X13 [mil] "BGA153_P14_P5_11P5X13"
  round 10 smd mask+2: A1(-127.95,127.95) A2(-108.27,127.95) A3(-88.58,127.95) A4(-68.9,127.95) A5(-49.21,127.95) A6(-29.53,127.95) A7(-9.84,127.95) A8(9.84,127.95) A9(29.53,127.95) A10(49.21,127.95) A11(68.9,127.95) A12(88.58,127.95) A13(108.27,127.95) A14(127.95,127.95) B1(-127.95,108.27) B2(-108.27,108.27) B3(-88.58,108.27) B4(-68.9,108.27) B5(-49.21,108.27) B6(-29.53,108.27) B7(-9.84,108.27) B8(9.84,108.27) B9(29.53,108.27) B10(49.21,108.27) B11(68.9,108.27) B12(88.58,108.27) B13(108.27,108.27) B14(127.95,108.27) C1(-127.95,88.58) C2(-108.27,88.58) C3(-88.58,88.58) C4(-68.9,88.58) C5(-49.21,88.58) C6(-29.53,88.58) C7(-9.84,88.58) C8(9.84,88.58) C9(29.53,88.58) C10(49.21,88.58) C11(68.9,88.58) C12(88.58,88.58) C13(108.27,88.58) C14(127.95,88.58) D1(-127.95,68.9) D2(-108.27,68.9) D3(-88.58,68.9) D4(-68.9,68.9) D12(88.58,68.9) D13(108.27,68.9) D14(127.95,68.9) E1(-127.95,49.21) E2(-108.27,49.21) E3(-88.58,49.21) E5(-49.21,49.21) E6(-29.53,49.21) E7(-9.84,49.21) E8(9.84,49.21) E9(29.53,49.21) E10(49.21,49.21) E12(88.58,49.21) E13(108.27,49.21) E14(127.95,49.21) F1(-127.95,29.53) F2(-108.27,29.53) F3(-88.58,29.53) F5(-49.21,29.53) F10(49.21,29.53) F12(88.58,29.53) F13(108.27,29.53) F14(127.95,29.53) G1(-127.95,9.84) G2(-108.27,9.84) G3(-88.58,9.84) G5(-49.21,9.84) G10(49.21,9.84) G12(88.58,9.84) G13(108.27,9.84) G14(127.95,9.84) H1(-127.95,-9.84) H2(-108.27,-9.84) H3(-88.58,-9.84) H5(-49.21,-9.84) H10(49.21,-9.84) H12(88.58,-9.84) H13(108.27,-9.84) H14(127.95,-9.84) J1(-127.95,-29.53) J2(-108.27,-29.53) J3(-88.58,-29.53) J5(-49.21,-29.53) J10(49.21,-29.53) J12(88.58,-29.53) J13(108.27,-29.53) J14(127.95,-29.53) K1(-127.95,-49.21) K2(-108.27,-49.21) K3(-88.58,-49.21) K5(-49.21,-49.21) K6(-29.53,-49.21) K7(-9.84,-49.21) K8(9.84,-49.21) K9(29.53,-49.21) K10(49.21,-49.21) K12(88.58,-49.21) K13(108.27,-49.21) K14(127.95,-49.21) L1(-127.95,-68.9) L2(-108.27,-68.9) L3(-88.58,-68.9) L12(88.58,-68.9) L13(108.27,-68.9) L14(127.95,-68.9) M1(-127.95,-88.58) M2(-108.27,-88.58) M3(-88.58,-88.58) M4(-68.9,-88.58) M5(-49.21,-88.58) M6(-29.53,-88.58) M7(-9.84,-88.58) M8(9.84,-88.58) M9(29.53,-88.58) M10(49.21,-88.58) M11(68.9,-88.58) M12(88.58,-88.58) M13(108.27,-88.58) M14(127.95,-88.58) N1(-127.95,-108.27) N2(-108.27,-108.27) N3(-88.58,-108.27) N4(-68.9,-108.27) N5(-49.21,-108.27) N6(-29.53,-108.27) N7(-9.84,-108.27) N8(9.84,-108.27) N9(29.53,-108.27) N10(49.21,-108.27) N11(68.9,-108.27) N12(88.58,-108.27) N13(108.27,-108.27) N14(127.95,-108.27) P1(-127.95,-127.95) P2(-108.27,-127.95) P3(-88.58,-127.95) P4(-68.9,-127.95) P5(-49.21,-127.95) P6(-29.53,-127.95) P7(-9.84,-127.95) P8(9.84,-127.95) P9(29.53,-127.95) P10(49.21,-127.95) P11(68.9,-127.95) P12(88.58,-127.95) P13(108.27,-127.95) P14(127.95,-127.95)
  silkscreen extent -226,-256 226,256
CAP0402 [mm] "Chip Capacitor, 2-Leads, Body 1.00x0.50mm, IPC Medium Density"
  rect 0.66x0.62 smd: 1(-0.44,0) 2(0.44,0)
  body extent -0.53,-0.28 0.53,0.28, height 0.55
CAP0805 [mm] "Chip Capacitor, 2-Leads, Body 2.00x1.25mm, IPC Medium Density"
  rect 0.9x1.45 smd: 1(-1.025,0) 2(1.025,0)
  silkscreen extent -0.2,-0.63 0.2,0.63, body extent -1.1,-0.72 1.1,0.72, height 1.45
CONN3-PWR-PJ102A [mil] "CONN3-PWR-PJ102A"
  oval 70x180 hole 40 mask+2: 1(-245,0)
  oval 70x150 hole 40 mask+2: 2(-9,0)
  oval 150x70 hole 40 mask+2: 3(-127,185)
  silkscreen extent -280,-180 295,180
HEADER10X2_SMD [mil] "HEADER10X2_SMD"
  rect 28x110 smd mask+2: 1(225,106.5) 2(225,-106.5) 3(175,106.5) 4(175,-106.5) 5(125,106.5) 6(125,-106.5) 7(75,106.5) 8(75,-106.5) 9(25,106.5) 10(25,-106.5) 11(-25,106.5) 12(-25,-106.5) 13(-75,106.5) 14(-75,-106.5) 15(-125,106.5) 16(-125,-106.5) 17(-175,106.5) 18(-175,-106.5) 19(-225,106.5) 20(-225,-106.5)
  silkscreen extent -250,-150 250,150
HEADER23X2 [mil] "HEADER23X2"
  rect 60x60 hole 30 mask+2: 1(-1100,-50)
  round 60 hole 30 mask+2: 2(-1100,50) 3(-1000,-50) 4(-1000,50) 5(-900,-50) 6(-900,50) 7(-800,-50) 8(-800,50) 9(-700,-50) 10(-700,50) 11(-600,-50) 12(-600,50) 13(-500,-50) 14(-500,50) 15(-400,-50) 16(-400,50) 17(-300,-50) 18(-300,50) 19(-200,-50) 20(-200,50) 21(-100,-50) 22(-100,50) 23(0,-50) 24(0,50) 25(100,-50) 26(100,50) 27(200,-50) 28(200,50) 29(300,-50) 30(300,50) 31(400,-50) 32(400,50) 33(500,-50) 34(500,50) 35(600,-50) 36(600,50) 37(700,-50) 38(700,50) 39(800,-50) 40(800,50) 41(900,-50) 42(900,50) 43(1000,-50) 44(1000,50) 45(1100,-50) 46(1100,50)
  silkscreen extent -1150,-100 1150,100
LED_0603 [mil] "LED_0603"
  rect 30x40 smd mask+2: 1(-32.5,0) 2(32.5,0)
  silkscreen extent -70,-35 60,35
MTGH200C125D_PL [mil] "MTGH200C125D_PL"
  round 175 hole 125 mask+2: 1(-15.5,0)
OSC4_61X65LS_79X98SMD [mil] "OSC4_61X65LS_79X98SMD"
  rect 28x35 smd mask+2: 1(-32.5,-30.5) 2(32.5,-30.5) 3(32.5,30.5) 4(-32.5,30.5)
  silkscreen extent -62,-62 62,62
RD205SMD_250D [mil] "RD205SMD_250D"
  rect 120x65 smd mask+2: 1(-102.5,0) 2(102.5,0)
  silkscreen extent -188,-125 125,125
RES0402 [mm] "Chip Resistor, 2-Leads, Body 1.00x0.50mm, IPC Medium Density"
  rect 0.55x0.55 smd: 1(-0.45,0) 2(0.45,0)
  body extent -0.53,-0.28 0.53,0.28, height 0.4
SD-MICRO-SCHA5B0300 [mil] "SD-MICRO-SCHA5B0300"
  rect 36x18 smd mask+2: 1(285.72,130) 2(285.72,157.56) 3(285.72,185.12) 4(285.72,212.68) 5(-285.72,212.68) 6(-285.72,185.12) 7(-285.72,157.56) 8(-285.72,130)
  rect 20x35 smd mask+2: 9(-148.62,-263.28) 10(235.24,-263.28)
  rect 35x79 smd mask+2: 11(285.43,-170.59) 12(-285.43,-119.41)
  rect 44x60 smd mask+2: 13(283.32,262.48) 14(-283.32,262.48)
  rect 47x43 smd mask+2: 15(134.84,-282.91) 16(-101.37,-282.91)
  silkscreen extent -288,-288 288,315
SIP6 [mil] "SIP6"
  rect 60x60 hole 40 mask+2: 1(0,250)
  round 60 hole 40 mask+2: 2(0,150) 3(0,50) 4(0,-50) 5(0,-150) 6(0,-250)
  silkscreen extent -50,-300 50,300
SM-7351-IND-0805 [mil] "SM-7351-IND-0805"
  rect 55x61 smd mask+2: 1(37.4,0) 2(-37.4,0)
  silkscreen extent -43,-28 43,28
SOIC-8 [mm] "SOIC, 8-Leads, Body 4.90x3.90mm, Pitch 1.27mm, IPC Medium Density"
  oval 1.45x0.6 smd: 1(-2.725,1.905) 2(-2.725,0.635) 3(-2.725,-0.635) 4(-2.725,-1.905) 5(2.725,-1.905) 6(2.725,-0.635) 7(2.725,0.635) 8(2.725,1.905)
  silkscreen extent -2.85,-2.5 1.6,2.88, body extent -3,-2.5 3,2.5, height 1.75
SOT23-5 [mil] "SOT23-5"
  rect 25x40 smd mask+2: 1(37.5,51) 2(0,51) 3(-37.5,51) 4(-37.5,-51) 5(37.5,-51)
  silkscreen extent -75,-88 75,88
SW4SMD_63X161LS [mil] "SW4SMD_63X161LS"
  rect 35x40 smd mask+2: 1(-80.71,-31.5) 2(-80.71,31.5) 3(80.71,-31.5) 4(80.71,31.5)
  silkscreen extent -108,-59 108,59
tp1-8040 [mil] "TP1-8040"
  round 60 hole 40 mask+2: 1(0,0)
  silkscreen extent -50,-50 50,50
TP60C33D [mil] "TP60C33D"
  round 60 hole 30 mask+2: 1(0,0)
  silkscreen extent -50,-50 50,50
TP60C_SMD [mm] "TP60C_SMD"
  round 1.27 smd mask+0.051: 1(0,0)
U_6_DRY [mil] "U_6_DRY"
  rect 12x20 smd mask+2: 1(-19.68,-17.28) 2(0,-17.28) 3(19.68,-17.28) 4(19.68,17.28) 5(0,17.28) 6(-19.68,17.28)
  silkscreen extent -30,-21 30,21
U_48_RSL [mil] "U_48_RSL"
  rect 31.5x7.87 smd mask+2: 1(-121.06,86.61) 2(-121.06,70.87) 3(-121.06,55.12) 4(-121.06,39.37) 5(-121.06,23.62) 6(-121.06,7.87) 7(-121.06,-7.87) 8(-121.06,-23.62) 9(-121.06,-39.37) 10(-121.06,-55.12) 11(-121.06,-70.87) 12(-121.06,-86.61) 25(121.06,-86.61) 26(121.06,-70.87) 27(121.06,-55.12) 28(121.06,-39.37) 29(121.06,-23.62) 30(121.06,-7.87) 31(121.06,7.87) 32(121.06,23.62) 33(121.06,39.37) 34(121.06,55.12) 35(121.06,70.87) 36(121.06,86.61)
  rect 7.87x31.5 smd mask+2: 13(-86.61,-121.06) 14(-70.87,-121.06) 15(-55.12,-121.06) 16(-39.37,-121.06) 17(-23.62,-121.06) 18(-7.87,-121.06) 19(7.87,-121.06) 20(23.62,-121.06) 21(39.37,-121.06) 22(55.12,-121.06) 23(70.87,-121.06) 24(86.61,-121.06) 37(86.61,121.06) 38(70.87,121.06) 39(55.12,121.06) 40(39.37,121.06) 41(23.62,121.06) 42(7.87,121.06) 43(-7.87,121.06) 44(-23.62,121.06) 45(-39.37,121.06) 46(-55.12,121.06) 47(-70.87,121.06) 48(-86.61,121.06)
  rect 159.45x159.45 smd mask+2: 49(-8.86,8.86)
  silkscreen extent -121,-121 121,121
USB5MINI_4SHIELDED_SMD-5 [mm] "USB5MINI_4SHIELDED_SMD-5"
  rect 1.4x0.5 smd mask+0.051: 1(-3,-1.6) 2(-3,-0.8) 3(-3,0) 4(-3,0.8) 5(-3,1.6)
  rect 3.81x2.54 smd mask+0.051: 6(-0.6,-4.2) 7(-0.6,4.2)
  rect 0.8x2.35 smd mask+0.051: 8(2.2,-2.675) 9(2.2,2.675)
  Top Layer keep-out region: 1.35,-3.9 1.75,-3.9 1.75,-1.45 2.65,-1.45 2.65,-3.9 3.1,-3.9 3.1,3.9 2.65,3.9 2.65,1.45 1.75,1.45 1.75,3.9 1.35,3.9 1.35,2.9 1,2.9 1,1.5 -0.5,1.5 -0.5,-1.5 1,-1.5 1,-2.9 1.35,-2.9 1.35,-3.9
  silkscreen extent -3.4,-3.85 3.6,3.85
usb_a_sh [mil] "USB_A_SH"
  round 65 hole 40 mask+2: 1(-137.1,235.7) 2(-38.7,235.7) 3(40.1,235.7) 4(138.5,235.7)
  oval 80x135 hole 40 mask+2: 5(-258,129) 6(259.4,129)
  silkscreen extent -258,-276 258,276
XTAL4_126-216SMD [mil] "XTAL4_126-216SMD"
  rect 50x75 smd mask+2: 1(-108.2,-63) 2(108.3,-63) 3(108.3,63) 4(-108.2,63)
  silkscreen extent -162,-88 163,88
XTAL150SMD_125X196 [mil] "XTAL150SMD_125X196"
  rect 70x85 smd mask+2: 1(-74.8,0) 2(74.8,0)
  silkscreen extent -118,-69 118,69

## Part data
C1 C2 C4 C5 C6 C7 C8 C9 C10 C11 C12 C13: library part CAP_10uF, "MLCC 10uF 0805 SMD", Capacitance=10uF, Case/Package=0805, Case Code (Metric)=2012, Dielectric=X6S, Dielectric Material=Ceramic, Manufacturer=TDK, Max Operating Temperature=105°C, Min Operating Temperature=-55°C, Package Quantity=4000, Supplier Part Number 1=445-7613-1-ND, Tolerance=10%, Voltage Rating=10V, Case Code (Imperial)=0805, ComponentLink3Description=Datasheet, ComponentLink3URL=https://datasheet.ciiva.com/6290/tdkmlcccaprange-6290501.pdf?src-supplier=Digi-Key, Composition=Ceramic, Depth=1.25mm, Height=1.25mm, Lead Free="Lead Free", Length=2mm, Manufacturer Part Number=C2012X6S1A106K085AC, Mount="Surface Mount", Packaging="Tape and Reel", Pricing 1="1=0.30000, 10=0.20500, 100=0.11610, 500=0.08198, 1000=0.07173 (USD)", REACH SVHC="No SVHC", RoHS=Yes, Stock 1=46852, Supplier 1=Digi-Key, Termination=SMD/SMT, Thickness=0.037inch, Voltage Rating (DC)=10V, Weight=0.000194oz, Width=0.049inch
C3 C18: library part CAP_100nF, "MLCC 100nF 0402 SMD", Capacitance=100nF, Case/Package=0402, Case Code (Metric)=1005, Dielectric=X7R, Manufacturer=KEMET, Max Operating Temperature=125°C, Min Operating Temperature=-55°C, Package Quantity=10000, Supplier Part Number 1=399-3521-1-ND, Tolerance=10%, Voltage Rating=16V, Case Code (Imperial)=0402, ComponentLink2Description=Datasheet, ComponentLink2URL=https://datasheet.ciiva.com/18192/getdatasheetpartid-385384-18192412.pdf?src-supplier=Verical, Contact Plating=Tin,Matte, Depth=0.5mm, Dissipation Factor=3.5%, Height=0.5mm, Length=1mm, Manufacturer Part Number=C0402C104K4RACTU, Mount="Surface Mount", Packaging="Tape and Reel", Pricing 1="1=0.10000, 10=0.04200, 100=0.01860, 500=0.01328, 1000=0.01044, 2500=0.00949, 5000=0.00873 (USD)", Radiation Hardening=No, RoHS=Yes, Stock 1=6512243, Supplier 1=Digi-Key, Termination=SMD/SMT, Voltage Rating (DC)=16V, Width=0.5mm
C14 C15 C16: library part CAP_2.2uF, "MLCC 2.2uF 0402 SMD", Capacitance=2.2uF, Case/Package=0402, Case Code (Metric)=1005, Dielectric=X5R, Dielectric Material=Ceramic, Manufacturer=TDK, Max Operating Temperature=85°C, Min Operating Temperature=-55°C, Package Quantity=1, Tolerance=10%, Voltage=6.3V, Case Code (Imperial)=0402, ComponentLink7Description=Datasheet, ComponentLink7URL=https://product.tdk.com/info/en/catalog/datasheets/mlcc_commercial_general_en.pdf?ref_disty=digikey, Composition=Ceramic, Depth=0.5mm, Height=0.5mm, Lead Free="Lead Free", Length=1mm, Manufacturer Part Number=C1005X5R0J225K050BC, Mount="Surface Mount", Number of Pins=2, Packaging="Tape and Reel", Pricing 1="1=0.20000, 10=0.13800, 100=0.07010, 500=0.04794, 1000=0.04240, 2500=0.04056, 5000=0.03687 (USD)", Radiation Hardening=No, REACH SVHC="No SVHC", RoHS=Yes, Stock 1=256055, Supplier 1=Digi-Key, Termination=SMD/SMT, Thickness=0.022inch, Voltage Rating=6.3V, Voltage Rating (DC)=6.3V, Weight=2.3E-05oz, Width=0.02inch
C21 C22 C25 C26: library part CAP_18PF_COG_50V_5%_0402, "CAP CER 18PF 50V 5% NP0 0402", Capacitance=18pF, Manufacturer="TDK Corporation", Manufacturer Part Number=C1005C0G1H180J050BA, Operating Temperature="-55°C ~ 125°C", Package / Case="0402 (1005 Metric)", Ratings=-, Supplier Part Number 1=445-1238-6-ND, Temperature Coefficient="C0G, NP0", Tolerance=±5%, Voltage - Rated=50V, Applications="General Purpose", Category=Capacitors, ComponentLink1Description=http://product.tdk.com/capacitor/mlcc/en/documents/mlcc_commercial_general_en.pdf, ComponentLink1URL=http://product.tdk.com/capacitor/mlcc/en/documents/mlcc_commercial_general_en.pdf, Features=-, Height - Seated (Max)=-, Lead Spacing=-, Lead Style=-, Mounting Type="Surface Mount, MLCC", Packaging=Digi-Reel®, Pricing 1="1=0.1, 10=0.024, 100=0.011, 250=0.009, 500=0.0077, 1000=0.006, 5000=0.005 (USD)", RoHS="RoHS Compliant", Size / Dimension="0.039\" L x 0.020\" W (1.00mm x 0.50mm)", Stock 1=352554, Supplier 1=Digi-Key, Thickness (Max)="0.022\" (0.55mm)"
C24 C89 C90 C91 C104: library part CAP_1.0UF_X5R_10V_10%_0402, "CAP CER 1UF 10V 10% X5R 0402", Capacitance=1.0µF, Manufacturer="AVX Corporation", Manufacturer Part Number=0402ZD105KAT2A, Operating Temperature="-55°C ~ 85°C", Package / Case="0402 (1005 Metric)", Ratings=-, Supplier Part Number 1=478-4596-6-ND, Temperature Coefficient=X5R, Tolerance=±10%, Voltage - Rated=10V, Applications="General Purpose", Category=Capacitors, ComponentLink1Description=http://www.avx.com/docs/Catalogs/cx5r.pdf, ComponentLink1URL=http://www.avx.com/docs/Catalogs/cx5r.pdf, Features=-, Height - Seated (Max)=-, Lead Spacing=-, Lead Style=-, Mounting Type="Surface Mount, MLCC", Packaging=Digi-Reel®, Pricing 1="1=0.3, 10=0.25, 100=0.125, 250=0.09376, 500=0.08282, 1000=0.07344, 5000=0.06094 (USD)", RoHS="RoHS Compliant", Size / Dimension="0.039\" L x 0.020\" W (1.00mm x 0.50mm)", Stock 1=409277, Supplier 1=Digi-Key, Thickness (Max)="0.022\" (0.56mm)"